# EAGLE board CT_schematic (EAGLE 7.6.0)

Size 100 x 80 mm. Coordinates in mm from the lower left corner, seen from the top.
Outline: 0,0 100,0 100,80 0,80 0,0
Copper layers (1*16): Top 0.035mm / dielectric 1.5mm / Bottom 0.035mm
Design rules "default": minimum track width 10mil, minimum drill 24mil, track to track 8mil, track to pad 8mil, pad to pad 8mil, via to via 8mil, smd to smd 8mil, copper to edge 40mil, drill to drill 8mil, minimum pad ring 10mil, minimum via ring 8mil, stop-mask expansion 4mil, vias tented up to drill 0mil, thermal gap 10mil

## Footprints (pad centres in the part's own frame; a part is rotated, then mirrored left to right if it is on the bottom)
C0603 = smd 0.8 x 0.8: 1 -0.762,0; 2 0.762,0
C0402 = smd 0.5 x 0.5: 1 -0.508,0; 2 0.508,0
C1210 = smd 1.2 x 2.5: 1 -1.524,0; 2 1.524,0
C0805 = smd 1.2 x 1.3: 1 -1.016,0; 2 1.016,0
R0603 = smd 0.8 x 0.8: 1 -0.762,0; 2 0.762,0
EXV-9H = smd 3.505 x 1.676: 1 -2.857,0; 2 2.857,0
L0603 = smd 0.8 x 0.8: 1 -0.762,0; 2 0.762,0
PJ-037B_PACKAGE = drill 3.7 square: 1 12,0 | drill 3.2 square: 2 6,0
WLCSP25 = smd 0.32 x 0.32: A1 -0.8,0.8; A2 -0.4,0.8; A3 0,0.8; A4 0.4,0.8; A5 0.8,0.8; B1 -0.8,0.4; B2 -0.4,0.4; B3 0,0.4; B4 0.4,0.4; B5 0.8,0.4; C1 -0.8,0; C2 -0.4,0; C3 0,0; C4 0.4,0; C5 0.8,0; D1 -0.8,-0.4; D2 -0.4,-0.4; D3 0,-0.4; D4 0.4,-0.4; D5 0.8,-0.4; E1 -0.8,-0.8; E2 -0.4,-0.8; E3 0,-0.8; E4 0.4,-0.8; E5 0.8,-0.8
WNG008 = smd 0.45 x 0.55: 1 -1.27,0; 2 0,0; 3 1.27,0; 4 2.54,0; 5 2.54,7.5; 6 1.27,7.5; 7 0,7.5; 8 -1.27,7.53 | smd 4.9 x 4.75: PAD 0.635,3.75
DFN-6 = smd 0.805 x 0.3: 1 -0.952,0.5; 2 -0.952,0; 3 -0.952,-0.5; 4 0.952,-0.5; 5 0.952,0; 6 0.952,0.5 | smd 0.61 x 1.42: 7 0,0
ABLS-25.000MHZ-B2F-T = smd 5.6 x 2.8: 1 -3.81,0; 2 5.69,0
WSON-8 = smd 0.3 x 0.6: 1 -0.75,0; 2 0.05,0; 3 0.85,0; 4 1.65,0; 5 1.65,3.8; 6 0.85,3.8; 7 0.05,3.8; 8 -0.75,3.8 | smd 3 x 2.6: PAD 0.45,1.9
SON-6 = smd 0.55 x 0.3: 1 -0.355,0.5 | smd 0.52 x 0.3: 2 -0.37,0; 3 -0.37,-0.5; 4 0.37,-0.5; 5 0.37,0; 6 0.37,0.5
DCU0008A_N = smd 0.5 x 0.3: 1 -1.6,0.75; 2 -1.6,0.25; 3 -1.6,-0.25; 4 -1.6,-0.75; 5 1.6,-0.75; 6 1.6,-0.25; 7 1.6,0.25; 8 1.6,0.75
SW_4-1437565-2 = smd 1.4 x 2.1: 1 -2.23,4.55; 2 -2.23,-4.55; 3 2.23,4.55; 4 2.23,-4.55
LGM67K-G1J2-24-Z = smd 0.8 x 1.4: A -2,0; C 0,0
NC7SZ125M5X = smd 1.3 x 0.7: 1 -1.3,0.95; 2 -1.3,0; 3 -1.3,-0.95; 4 1.3,-0.95; 5 1.3,0.95

## Placement (x,y rotation side)
C1  1e-07  [C0603]  -15.24,57.15 0 top  (outside the outline)
C2  1e-07  [C0603]  -19.05,57.15 0 top  (outside the outline)
C3  4.7e-06  [C0603]  -59.69,52.07 0 top  (outside the outline)
C4  1e-08  [C0603]  -22.86,57.15 0 top  (outside the outline)
C5  1e-06  [C0603]  -26.67,57.15 0 top  (outside the outline)
C6  1e-11  [C0402]  -15.24,62.23 0 top  (outside the outline)
C7  1e-11  [C0402]  -19.05,62.23 0 top  (outside the outline)
C8  1e-08  [C0402]  -22.86,62.23 0 top  (outside the outline)
C9  1e-07  [C0402]  -26.67,62.23 0 top  (outside the outline)
C10  1e-08  [C0402]  -30.48,62.23 0 top  (outside the outline)
C11  1e-05  [C1210]  -49.53,39.37 0 top  (outside the outline)
C12  1e-05  [C0805]  -21.59,45.72 0 top  (outside the outline)
C13  8e-07  [R0603]  -30.48,57.15 0 top  (outside the outline)
C14  1e-05  [C1210]  -55.88,39.37 0 top  (outside the outline)
C15  1e-07  [C0402]  -34.29,62.23 0 top  (outside the outline)
C16  0.0001  [EXV-9H]  -36.83,30.48 0 top  (outside the outline)
C17  0.0001  [EXV-9H]  -48.26,30.48 0 top  (outside the outline)
C18  1e-08  [C0402]  -38.1,62.23 0 top  (outside the outline)
C19  1e-07  [C0402]  -41.91,62.23 0 top  (outside the outline)
C20  1e-08  [C0402]  -45.72,62.23 0 top  (outside the outline)
C21  1e-07  [C0402]  -49.53,62.23 0 top  (outside the outline)
C22  1e-08  [C0402]  -53.34,62.23 0 top  (outside the outline)
F1  240.0  [L0603]  -34.29,57.15 0 top  (outside the outline)
J1  PJ-037B  [PJ-037B_PACKAGE]  -27.94,7.62 0 top  (outside the outline)
R1  10000.0  [R0603]  -57.15,45.72 0 top  (outside the outline)
R2  1000.0  [R0603]  -38.1,57.15 0 top  (outside the outline)
R3  910.0  [R0603]  -41.91,57.15 0 top  (outside the outline)
R4  4700.0  [R0603]  -45.72,57.15 0 top  (outside the outline)
R5  2200.0  [R0603]  -49.53,57.15 0 top  (outside the outline)
R6  2200.0  [R0603]  -53.34,57.15 0 top  (outside the outline)
R7  10000.0  [R0603]  -15.24,52.07 0 top  (outside the outline)
R8  10000.0  [R0603]  -20.32,52.07 0 top  (outside the outline)
R9  10000.0  [R0603]  -25.4,52.07 0 top  (outside the outline)
R10  10000.0  [R0603]  -30.48,52.07 0 top  (outside the outline)
R11  10000.0  [R0603]  -35.56,52.07 0 top  (outside the outline)
R12  100000.0  [R0603]  -26.67,45.72 0 top  (outside the outline)
R13  806.0  [R0603]  -57.15,57.15 0 top  (outside the outline)
R14  1000.0  [R0603]  -60.96,57.15 0 top  (outside the outline)
R15  100000.0  [R0603]  -31.75,45.72 0 top  (outside the outline)
R16  91000.0  [R0603]  -40.64,52.07 0 top  (outside the outline)
R17  100000.0  [R0603]  -36.83,45.72 0 top  (outside the outline)
R18  10000.0  [R0603]  -45.72,52.07 0 top  (outside the outline)
R19  10000.0  [R0603]  -50.8,52.07 0 top  (outside the outline)
R20  82000.0  [R0603]  -55.88,52.07 0 top  (outside the outline)
R21  300000.0  [R0603]  -41.91,45.72 0 top  (outside the outline)
R22  120000.0  [R0603]  -46.99,45.72 0 top  (outside the outline)
R23  200000.0  [R0603]  -52.07,45.72 0 top  (outside the outline)
U1  stm32f038e6y7  [WLCSP25]  -25.4,66.04 0 top  (outside the outline)
U2  S25FL128SDPNFI001  [WNG008]  -29.21,17.78 0 top  (outside the outline)
U3  SI7006-A20-IM  [DFN-6]  -44.45,66.04 0 top  (outside the outline)
U4  ABLS-25.000MHZ-B2F-T  [ABLS-25.000MHZ-B2F-T]  -26.67,39.37 0 top  (outside the outline)
U5  LP3878SDX-ADJ/NOPB  [WSON-8]  -49.53,17.78 0 top  (outside the outline)
U6  LP2951ACSDX/NOPB  [WSON-8]  -29.21,29.21 0 top  (outside the outline)
U7  TPS3895ADRYR  [SON-6]  -46.99,66.04 0 top  (outside the outline)
U8  LSF0102DCTR  [DCU0008A_N]  -38.1,66.04 0 top  (outside the outline)
U9  4-1437565-2  [SW_4-1437565-2]  -44.45,6.35 0 top  (outside the outline)
U10  Q65110A2395  [LGM67K-G1J2-24-Z]  -38.1,39.37 0 top  (outside the outline)
U11  nc7sz125m5x  [NC7SZ125M5X]  -15.24,45.72 0 top  (outside the outline)

## Library data of the parts
C1-C22 F1 J1 R1-R23 U1-U11 = circuit_tree

## Nets
CLK_CRYSTAL_U1_A5: C6.1 U1.A5 U4.1
CLK_CRYSTAL_U1_B5: C7.1 U1.B5 U4.2
GND: C1.2 C2.2 C3.2 C4.2 C5.2 C6.2 C7.2 C8.2 C9.2 C10.2 C11.2 C12.2 C13.2 C14.2 C15.2 C16.2 C17.2 C18.2 C19.2 C20.2 C21.2 C22.2 J1.2 R2.2 R7.2 R8.2 R14.2 R17.2 R20.2 R22.2 U1.E1 U2.4 U2.PAD U3.2 U3.7 U5.3 U5.PAD U6.3 U6.4 U6.PAD U7.2 U8.1 U10.C U11.1 U11.3
NET_U1_A3: R6.1 U1.A3 U8.3
NET_U1_A4: R7.1 U1.A4
NET_U1_B2: R5.1 U1.B2 U8.4
NET_U1_C5: R4.1 U1.C5 U11.4
NET_U1_D5: C4.1 C5.1 F1.1 U1.D5
NET_U1_E2: R8.1 U1.E2
NET_U1_E4: R3.1 U1.E4 U10.A
NET_U1_E5: R1.1 U1.E5 U9.3 U9.4
NET_U2_3: R9.1 U2.3
NET_U2_7: R11.1 U2.7
NET_U5_1: C10.1 U5.1
NET_U5_6: R13.2 R14.1 U5.6
NET_U5_8: R12.1 U5.8
NET_U6_5: R15.1 U6.5
NET_U6_7: R16.2 R17.1 U6.7
NET_U7_1: R19.1 R20.1 U7.1
NET_U7_3: R21.2 R22.1 U7.3
NET_U7_4: R18.1 U7.4 U11.2
NET_U8_8: R23.1 U8.8
NET_U9_1: R2.1 U9.1 U9.2
PROC_I2C1_SCL_TOXCVR: U3.6 U8.5
PROC_I2C1_SDA_TOXCVR: U3.1 U8.6
PROC_SPI1_MISO: U1.D3 U2.2
PROC_SPI1_MOSI: U1.C2 U2.5
PROC_SPI1_NSS: R10.1 U1.B3 U2.1
PROC_SPI1_SCK: U1.C3 U2.6
VCC_S1_13V0: C11.1 C13.1 C16.1 C17.1 J1.1 R12.2 U5.4 U6.8
VCC_TIER1_1V8: C1.1 C2.1 C3.1 C8.1 C12.1 C15.1 C20.1 C21.1 C22.1 F1.2 R1.2 R3.2 R4.2 R5.2 R6.2 R9.2 R10.2 R11.2 R13.1 R18.2 R19.2 R21.1 U1.D1 U2.8 U5.5 U7.6 U8.2 U11.5
VCC_TIER1_2V5: C9.1 C14.1 C18.1 C19.1 R15.2 R16.1 R23.2 U3.5 U6.1 U8.7

## Tracks (layer width: path | path; a pad name or v marks a point on that pad's centre or on a via)
CLK_CRYSTAL_U1_A5  (2 unrouted)
CLK_CRYSTAL_U1_B5  (2 unrouted)
GND  (44 unrouted)
NET_U1_A3  (2 unrouted)
NET_U1_A4  (1 unrouted)
NET_U1_B2  (2 unrouted)
NET_U1_C5  (2 unrouted)
NET_U1_D5  (3 unrouted)
NET_U1_E2  (1 unrouted)
NET_U1_E4  (2 unrouted)
NET_U1_E5  (3 unrouted)
NET_U2_3  (1 unrouted)
NET_U2_7  (1 unrouted)
NET_U5_1  (1 unrouted)
NET_U5_6  (2 unrouted)
NET_U5_8  (1 unrouted)
NET_U6_5  (1 unrouted)
NET_U6_7  (2 unrouted)
NET_U7_1  (2 unrouted)
NET_U7_3  (2 unrouted)
NET_U7_4  (2 unrouted)
NET_U8_8  (1 unrouted)
NET_U9_1  (2 unrouted)
PROC_I2C1_SCL_TOXCVR  (1 unrouted)
PROC_I2C1_SDA_TOXCVR  (1 unrouted)
PROC_SPI1_MISO  (1 unrouted)
PROC_SPI1_MOSI  (1 unrouted)
PROC_SPI1_NSS  (2 unrouted)
PROC_SPI1_SCK  (1 unrouted)
VCC_S1_13V0  (7 unrouted)
VCC_TIER1_1V8  (27 unrouted)
VCC_TIER1_2V5  (9 unrouted)